# Altium PCB PC104_16bit_9017X9589_104PIN.PcbDoc
Units mm, origin at the board's own origin, x right, y up, seen from the top; angles counter-clockwise.
Board outline 90.17 x 95.88 mm, 4 copper layers (TopLayer, InternalPlane1, InternalPlane2, BottomLayer), stack 0.848 mm thick; 2 components, 93 nets, 108 pads, 0 vias.
Unrouted connection lines stored in the file: 9.
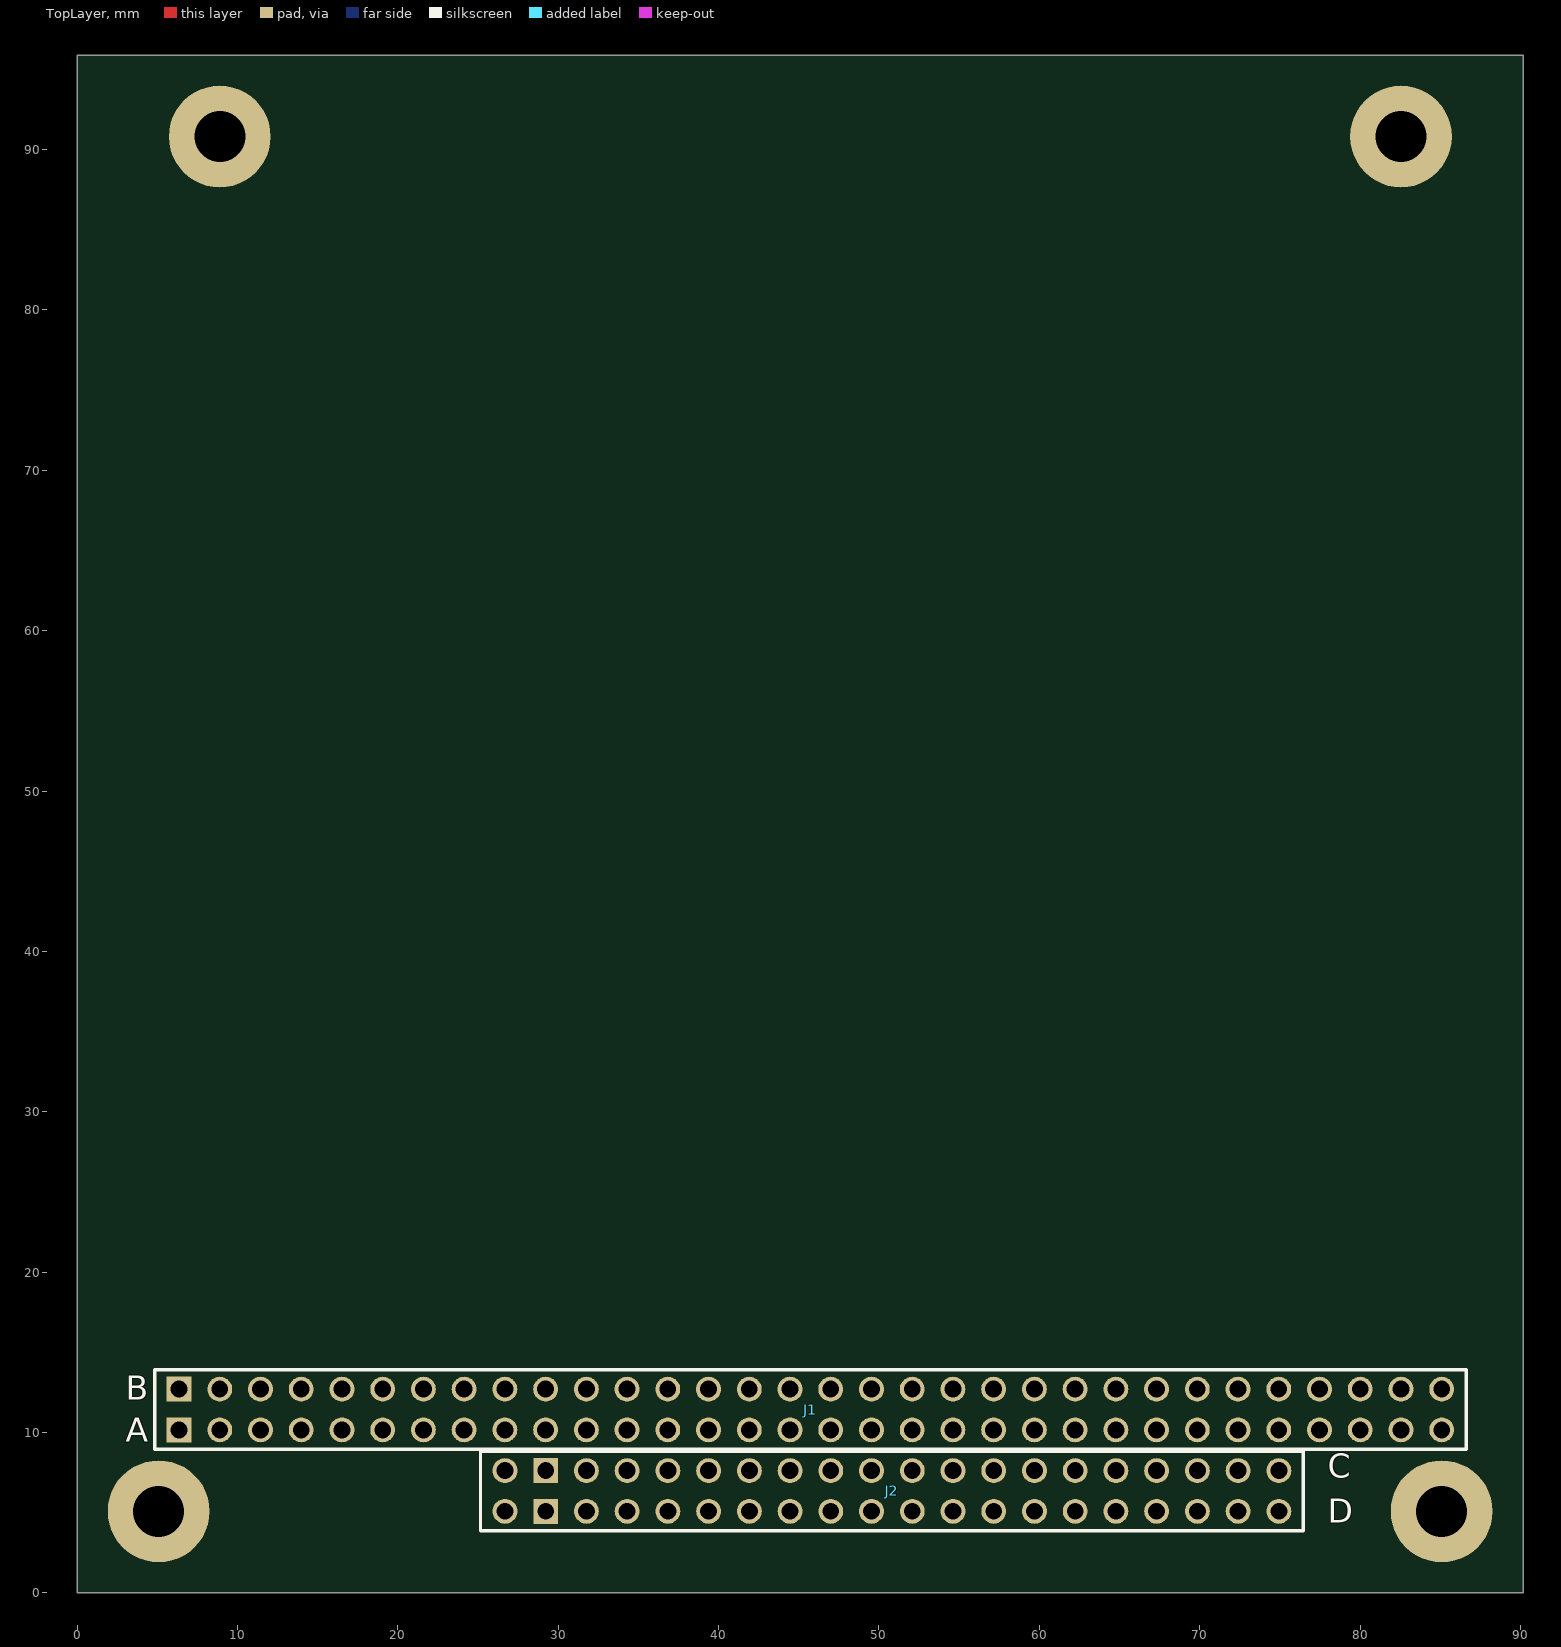
[diagram p0: TopLayer view]
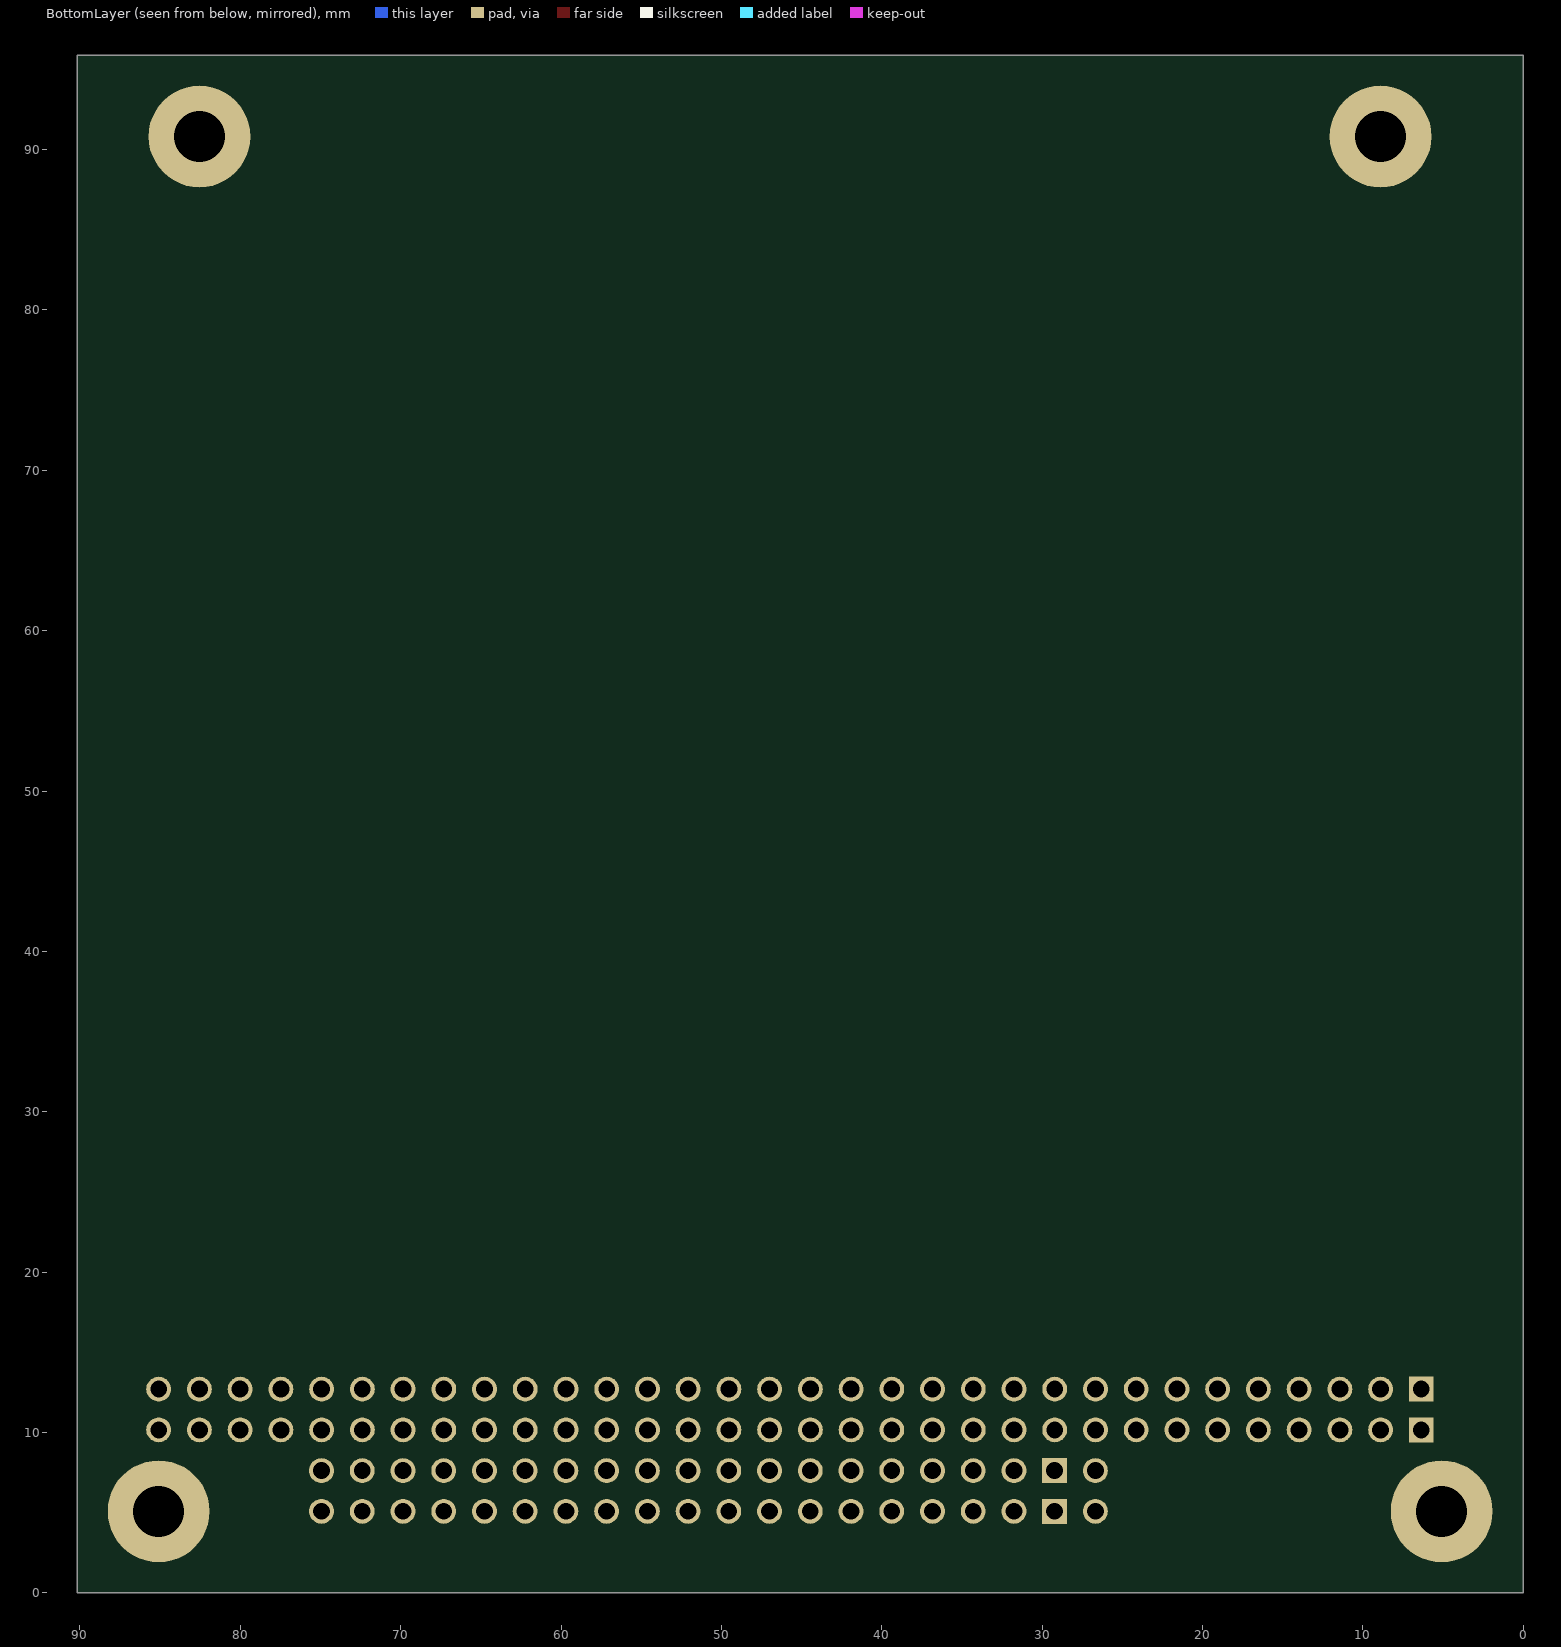
[diagram p1: BottomLayer view, seen from below]
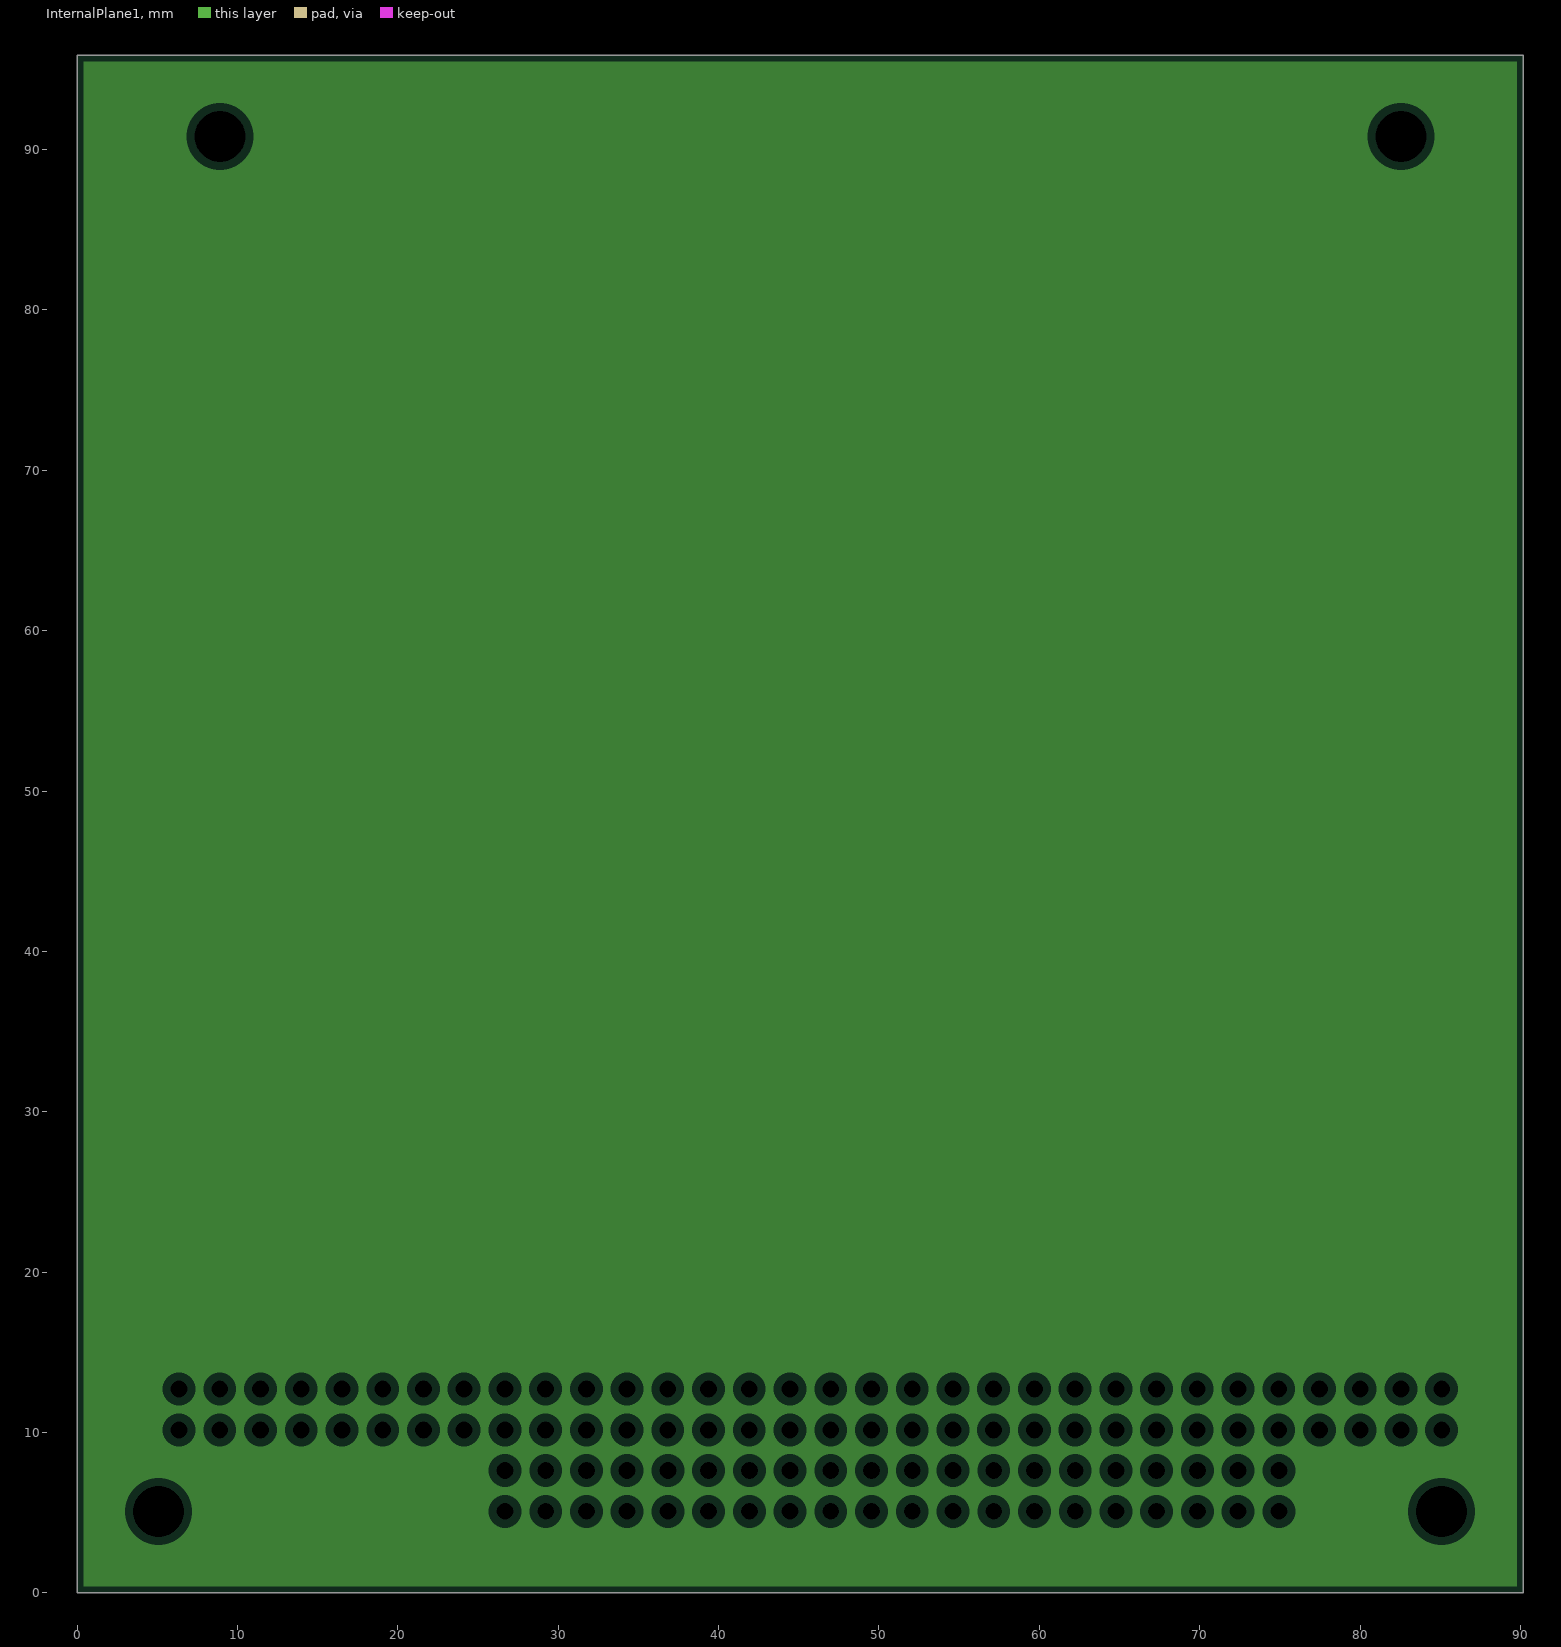
[diagram p2: InternalPlane1, clearances drawn from the general rule]
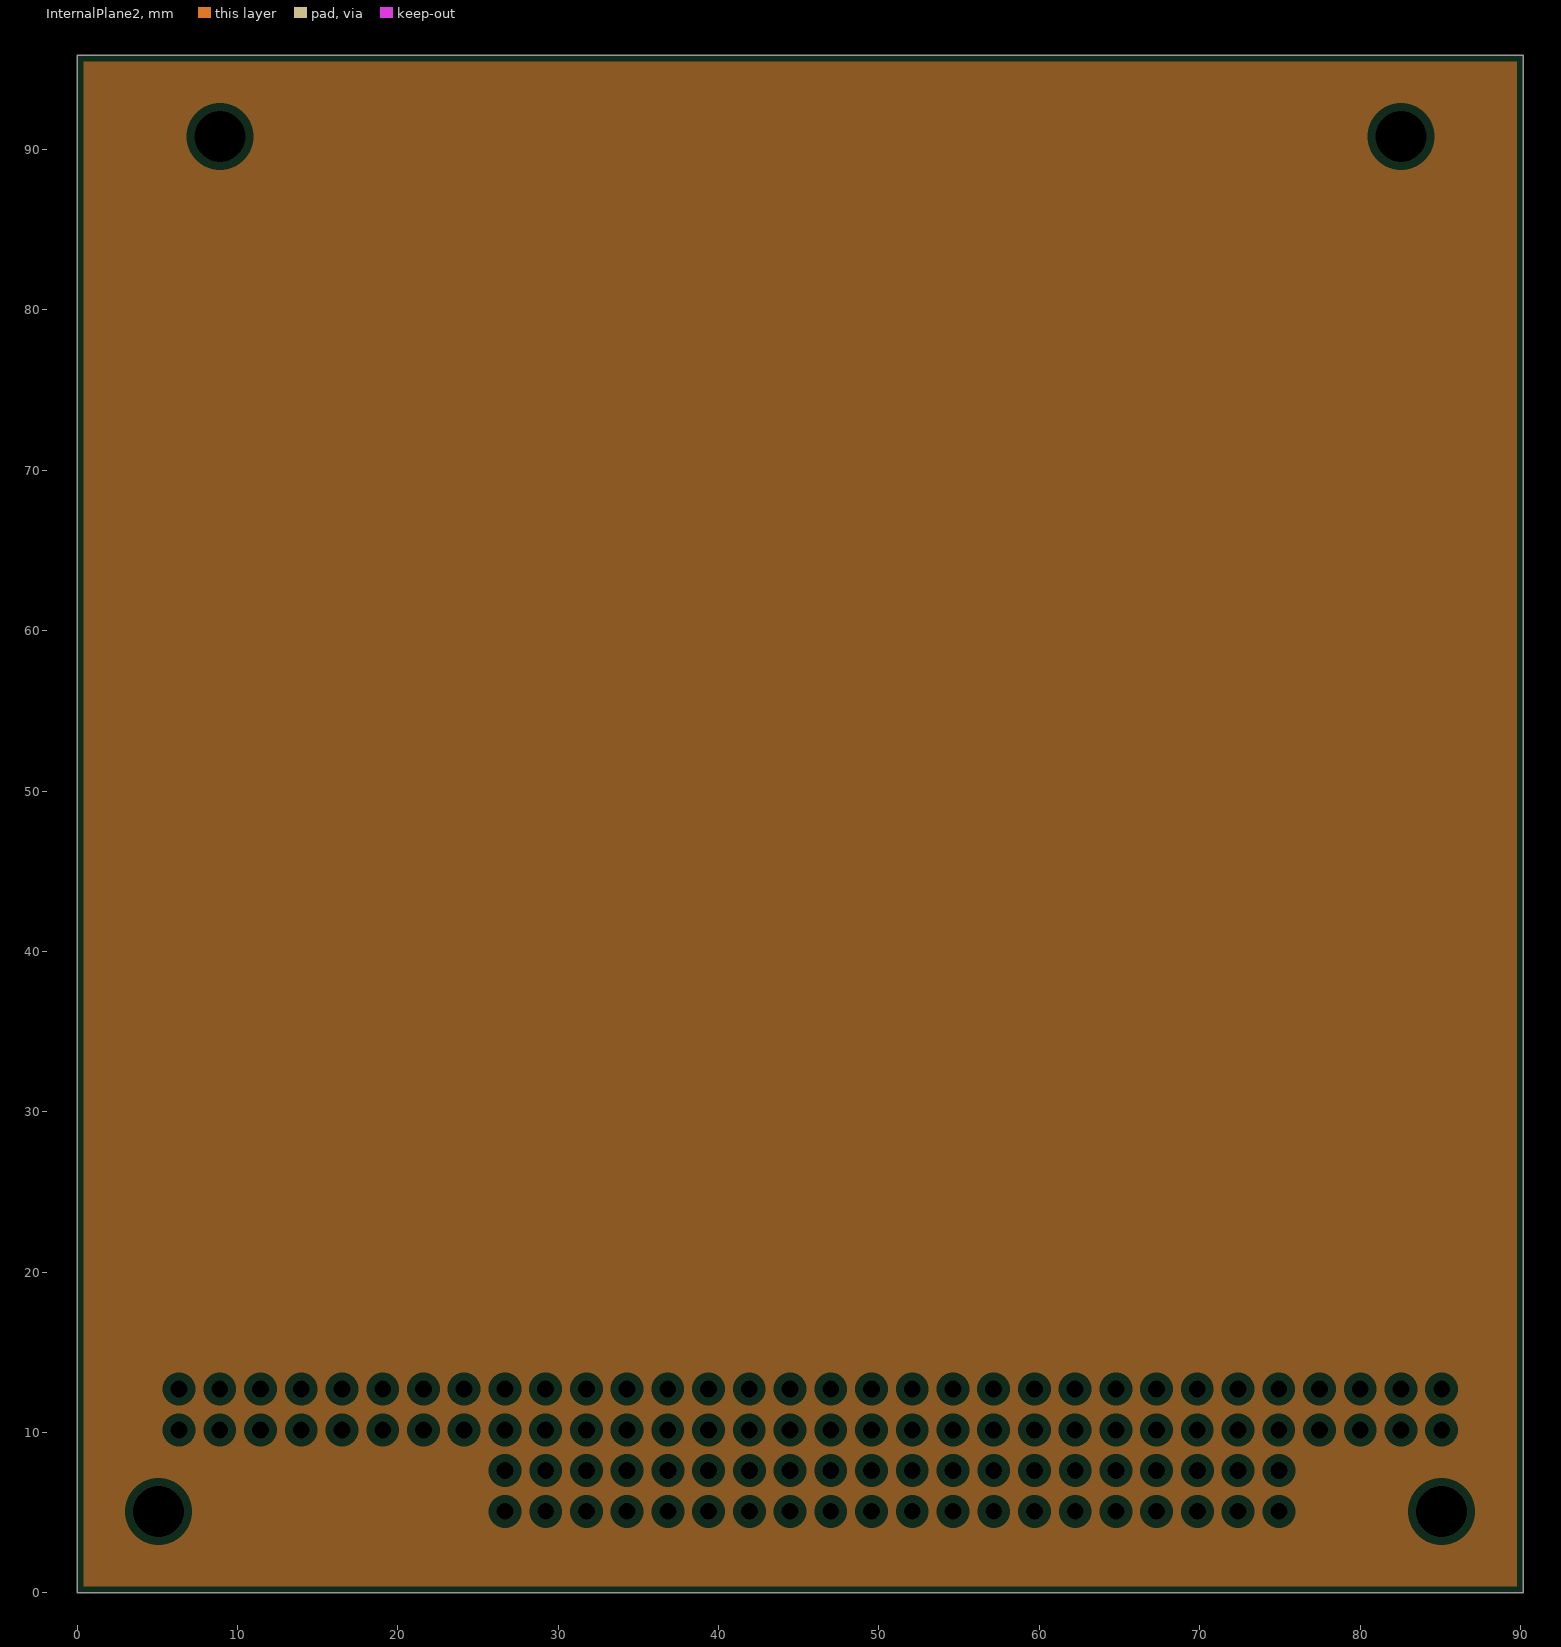
[diagram p3: InternalPlane2, clearances drawn from the general rule]

## Layer stack, top to bottom
TopLayer: signal copper 0.0178
Dielectric: core 0.1016, FR-4, Dk 4.8
InternalPlane1: plane copper 0.0356
Dielectric: prepreg 0.32, FR-4, Dk 4.8
InternalPlane2: plane copper 0.0356
Dielectric: core 0.32, FR-4, Dk 4.8
BottomLayer: signal copper 0.0178

## Board outline
0,0 0,95.885 90.17,95.885 90.17,0

## Design rules (kind name [scope] priority, off if disabled: settings)
Clearance [All] p1: gap=0.254
ComponentClearance ComponentClearance_OverlappingComponents [(InComponent('J1') OR InComponent('J2')) vs (InComponent('J1') OR InComponent('J2'))] p1: gap=0 collisioncheckmode=3 verticalgap=0.254 showdistances=FALSE
ComponentClearance [All] p2: gap=0.254 collisioncheckmode=3 verticalgap=0.254 showdistances=FALSE
FabricationTestPointUsage TestPointUsage [All] p1: valid=0 allowmultiple=FALSE
FabricationTestpoint Testpoint [All] p1: side=3 testpointundercomponent=TRUE minsize=1.016 maxsize=2.54 preferedsize=1.524 minholesize=0.508 maxholesize=1.016 preferedholesize=0.813 testpointgrid=0.025 allowsidetop=TRUE allowsidebottom=TRUE usegrid=TRUE gridtolerance=0
Height "PC-104, Page 16, \"Component Height Constraint\"-BOTTOM" [OnLayer('BottomLayer')] p1: minheight=0 maxheight=2.54 prefheight=2.54
Height "PC-104, Page 16, \"Component Height Constraint\"-TOP" [OnLayer('TopLayer')] p2: minheight=0 maxheight=11.05 prefheight=11.05
PlaneClearance [All] p1: clearance=0.5
PlaneConnect [All] p1: planeconnectstyle=Relief reliefexpansion=0.508 reliefentries=4 reliefconductorwidth=0.254 reliefairgap=0.254
PolygonConnect [All] p1: connectstyle=Relief reliefconductorwidth=0.254 reliefentries=4 polygonreliefangle="90 Angle"
RoomDefinition "Component Area Back" [OnBottomLayer and NOT(InComponentClass('Board Template Connector'))] p1: confinementstyle=ConfineIn formatcopy=TRUE lockcomponents=FALSE outline 0,0 90.17,0 90.17,95.885 0,95.885 // Approximate
RoomDefinition "Component Area Front" [OnTopLayer and NOT(InComponentClass('Board Template Connector'))] p2: confinementstyle=ConfineIn formatcopy=TRUE lockcomponents=FALSE outline 0,0 90.17,0 90.17,95.885 0,95.885 // Approximate
RoutingVias [All] p1: holewidth=0.711 width=1.27 viastyle="Through Hole" minholewidth=0.711 minwidth=1.27 maxholewidth=0.711 maxwidth=1.27
SilkscreenOverComponentPads [All] p1: minsilkscreentomaskgap=0.254
SolderMaskExpansion [All] p1: expansion=0.102
Width [All] p1: maxlimit=0.254 minlimit=0.254 preferedwidth=0.254
21 further rules are at their usual default settings.

## Classes and differential pairs
component class U_CON_PC-104_8bit_64PIN_PC104: J1
component class U_CON_PC-104_16bit_40PIN_PC104: J2
net class DRQ[1..3]: DRQ0 DRQ1 DRQ2 DRQ3 DRQ5 DRQ6 DRQ7
net class LA[17..23]: LA17 LA18 LA19 LA20 LA21 LA22 LA23
net class SA[0..19]: SA0 SA1 SA2 SA3 SA4 SA5 SA6 SA7 SA8 SA9 SA10 SA11 SA12 SA13 SA14 SA15 SA16 SA17 SA18 SA19
net class SD[0..15]: SD0 SD1 SD2 SD3 SD4 SD5 SD6 SD7 SD8 SD9 SD10 SD11 SD12 SD13 SD14 SD15

## Components (designator, comment, footprint, x,y, rotation, side; value= is the part's Value field where it differs from the comment)
J1 "PC104-CN-2P-F-R64" BTB2-54-V64F-04 6.35,10.16 r0 top locked
J2 "PC104-CN-2P-F-R40" BTB2-54-V40F-04 29.215,7.62 r0 top locked

## Footprints (in the part's own frame and the unit in brackets; to place one, negate y for a bottom-side part, rotate by r counter-clockwise, add the part's x,y. Pads: shape width x height; smd on the part's side, far side on the other; paste and mask are expansions set on the pad)
BTB2-54-V40F-04 [mm] "Board-to-Board PC104 CD ISA, Stackthrough, Vertical, 2-Row, 40-Postion, Pitch 2.54mm, Receptacle"
  round 1.55 hole 1.05: C0(-2.54,0) C2(2.54,0) C3(5.08,0) C4(7.62,0) C5(10.16,0) C6(12.7,0) C7(15.24,0) C8(17.78,0) C9(20.32,0) C10(22.86,0) C11(25.4,0) C12(27.94,0) C13(30.48,0) C14(33.02,0) C15(35.56,0) C16(38.1,0) C17(40.64,0) C18(43.18,0) C19(45.72,0) D0(-2.54,-2.54) D2(2.54,-2.54) D3(5.08,-2.54) D4(7.62,-2.54) D5(10.16,-2.54) D6(12.7,-2.54) D7(15.24,-2.54) D8(17.78,-2.54) D9(20.32,-2.54) D10(22.86,-2.54) D11(25.4,-2.54) D12(27.94,-2.54) D13(30.48,-2.54) D14(33.02,-2.54) D15(35.56,-2.54) D16(38.1,-2.54) D17(40.64,-2.54) D18(43.18,-2.54) D19(45.72,-2.54)
  rect 1.55x1.55 hole 1.05: C1(0,0) D1(0,-2.54)
  silkscreen extent -4.07,-3.74 47.24,1.21, body extent -4.14,-3.74 47.32,1.21, height 11.05
BTB2-54-V64F-04 [mm] "Board-to-Board PC104 BA ISA, Stackthrough, Vertical, 2-Row, 64-Postion, Pitch 2.54mm,  Receptacle , Height 11.05mm"
  rect 1.55x1.55 hole 1.05: A1(0,0) B1(0,2.54)
  round 1.55 hole 1.05: A2(2.54,0) A3(5.08,0) A4(7.62,0) A5(10.16,0) A6(12.7,0) A7(15.24,0) A8(17.78,0) A9(20.32,0) A10(22.86,0) A11(25.4,0) A12(27.94,0) A13(30.48,0) A14(33.02,0) A15(35.56,0) A16(38.1,0) A17(40.64,0) A18(43.18,0) A19(45.72,0) A20(48.26,0) A21(50.8,0) A22(53.34,0) A23(55.88,0) A24(58.42,0) A25(60.96,0) A26(63.5,0) A27(66.04,0) A28(68.58,0) A29(71.12,0) A30(73.66,0) A31(76.2,0) A32(78.74,0) B2(2.54,2.54) B3(5.08,2.54) B4(7.62,2.54) B5(10.16,2.54) B6(12.7,2.54) B7(15.24,2.54) B8(17.78,2.54) B9(20.32,2.54) B10(22.86,2.54) B11(25.4,2.54) B12(27.94,2.54) B13(30.48,2.54) B14(33.02,2.54) B15(35.56,2.54) B16(38.1,2.54) B17(40.64,2.54) B18(43.18,2.54) B19(45.72,2.54) B20(48.26,2.54) B21(50.8,2.54) B22(53.34,2.54) B23(55.88,2.54) B24(58.42,2.54) B25(60.96,2.54) B26(63.5,2.54) B27(66.04,2.54) B28(68.58,2.54) B29(71.12,2.54) B30(73.66,2.54) B31(76.2,2.54) B32(78.74,2.54)
  silkscreen extent -1.52,-1.2 80.27,3.75, body extent -1.6,-1.2 80.34,3.75, height 11.05

## Part data
J1: library part CMP-0001-00110-1, "Board-to-Board Connector, PC104 BA ISA, Stackthrough, Vertical, 2-Row, 64-Postion, Pitch 2.54mm,  Receptacle, Height 11.05mm"
J2: library part CMP-0001-00107-1, "Board-to-Board Connector, PC104 CD ISA, Stackthrough, Vertical, 2-Row, 40-Postion, Pitch 2.54mm, Receptacle"

## Free pads (board coordinates)
  round 6.35 hole 3.18: MH1(5.08,5.08) MH2(85.09,5.08) MH3(8.89,90.81) MH4(82.55,90.81)

## Nets (pads, with @x,y where several pads share a name; then routed paths per layer and width w, separated by ;. In a path a pad name is that pad's centre, name@x,y a point inside that pad or via, vN(x,y) a via of type N, cw(c..) or ccw(c..) an arc to the next point about the centre after c; other vN are vias at no path point)
+5V: J1.B3 J1.B29 J2.D16
+12V: J1.B9
-5V: J1.B5
-12V: J1.B7
AEN: J1.A11
BALE: J1.B28
BCLK: J1.B20
DACK0*: J2.D8
DACK1*: J1.B17
DACK2*: J1.B26
DACK3*: J1.B15
DACK5*: J2.D10
DACK6*: J2.D12
DACK7*: J2.D14
DRQ0: J2.D9
DRQ1: J1.B18
DRQ2: J1.B6
DRQ3: J1.B16
DRQ5: J2.D11
DRQ6: J2.D13
DRQ7: J2.D15
GND: J1.A32 J1.B1 J1.B31 J1.B32 J2.C0 J2.D0 J2.D18 J2.D19
IOCHK*: J1.A1
IOCHRDY: J1.A10
IOCS16*: J2.D2
IOR*: J1.B14
IOW*: J1.B13
IRQ3: J1.B25
IRQ4: J1.B24
IRQ5: J1.B23
IRQ6: J1.B22
IRQ7: J1.B21
IRQ9: J1.B4
IRQ10: J2.D3
IRQ11: J2.D4
IRQ12: J2.D5
IRQ14: J2.D7
IRQ15: J2.D6
LA17: J2.C8
LA18: J2.C7
LA19: J2.C6
LA20: J2.C5
LA21: J2.C4
LA22: J2.C3
LA23: J2.C2
MASTER*: J2.D17
MEMCS16*: J2.D1
MEMR*: J2.C9
MEMW*: J2.C10
OSC: J1.B30
REFRESH*: J1.B19
RESET: J1.B2
SA0: J1.A31
SA1: J1.A30
SA2: J1.A29
SA3: J1.A28
SA4: J1.A27
SA5: J1.A26
SA6: J1.A25
SA7: J1.A24
SA8: J1.A23
SA9: J1.A22
SA10: J1.A21
SA11: J1.A20
SA12: J1.A19
SA13: J1.A18
SA14: J1.A17
SA15: J1.A16
SA16: J1.A15
SA17: J1.A14
SA18: J1.A13
SA19: J1.A12
SBHE*: J2.C1
SD0: J1.A9
SD1: J1.A8
SD2: J1.A7
SD3: J1.A6
SD4: J1.A5
SD5: J1.A4
SD6: J1.A3
SD7: J1.A2
SD8: J2.C11
SD9: J2.C12
SD10: J2.C13
SD11: J2.C14
SD12: J2.C15
SD13: J2.C16
SD14: J2.C17
SD15: J2.C18
SMEMR*: J1.B12
SMEMW*: J1.B11
SRDY*: J1.B8
TC: J1.B27
pads on no net: J1.B10 J2.C19

## Polygon pours and split planes (outlines as drawn)
no net on InternalPlane1 (split plane): 89.787,0.383 0.383,0.383 0.383,95.502 89.787,95.502
no net on InternalPlane2 (split plane): 89.787,0.383 0.383,0.383 0.383,95.502 89.787,95.502

## Keep-outs
Outline:
  lines w0.2: 0,0 0,8.255 0,87.63 0,95.885 90.17,95.885 90.17,87.63 90.17,8.255 90.17,0 24.13,0 8.255,0 0,0

## Silkscreen, mask and mechanical layers (free items; w line width, h text height)
Notes:
  rectangle: 90.17,8.255 102.87,87.63
  rectangle: 8.255,-12.7 24.13,0
  rectangle: -12.7,8.255 0,87.63
  text "I/O Connectors may overhang in this area" at 111.061,77.007 h1 r270
  text "I/O Connectors may overhang in this area" at -18.67,76.483 h1 r270
  text "- PC/104 Specification (Version 2.6)" at 134.5,72.5 h1.52
  text "- Nominal values used, all dimensions are mm." at 134.5,70.696 h1.52
  text "- MH1, MH2, MH3, MH4 are optional holes (PC_104 Embedded Consortium, Page 15)" at 134.5,68.918 h1.52
  text "(Includes Mating Connector)" at 106.693,68.549 h1 r270
  text "- Non-metalized areas from PC_104 Embedded Consortium are implemented as keepout / plane region objects." at 134.5,67.14 h1.52
  text "(Includes Mating Connector)" at -22.607,66.222 h1 r270
  text "- Component height rule derived from PC_104 Embedded Consortium (Page 16) \"Max Component Height \"." at 134.5,65.362 h1.52
  text "- Pinout nets were derived from PC/104 specification Version 2.6 (PC_104 Embedded Consortium.PDF)" at 134.5,63.584 h1.52
  text "- Component placement area arcs are aproximated." at 134.5,61.806 h1.52
  text "- Stackup is not specified in standard." at 134.5,60.028 h1.52
  text "- Connector pad size is derived from relevant IPC standard." at 134.5,58.25 h1.52
  text "1" at 5.944,14.834 h1
  text "1" at 28.931,1.676 h1
  text "I/O Connectors may overhang in this area" at -0.889,-16.059 h1
  text "(Includes Mating Connector)" at 4.851,-18.726 h1
Component Area (Approx):
  the board outline again, w0.2

## Dimensions
0,95.885 to 90.17,95.885 on Dimension
82.55,90.81 to 85.09,5.08 on Dimension
90.17,0 to 90.17,95.885 on Dimension
8.89,90.81 to 82.55,90.81 on Dimension

## Text inside footprints (layer, text, board x,y; h text height)
J1: TopOverlay "B" at 3.018,12.042 h1.5; TopOverlay "A" at 3.018,9.407 h1.5
J2: TopOverlay "C" at 77.982,7.177 h1.5; TopOverlay "D" at 77.982,4.383 h1.5